# Altium PCB Repro_Amp_V87_Stage_v0.01.PcbDoc
Units mil, origin at the board's own origin, x right, y up, seen from the top; angles counter-clockwise.
Board outline 9000 x 4200 mil, 2 copper layers (Top Layer, Bottom Layer); 69 components, 43 nets, 167 pads, 0 vias.
Unrouted connection lines stored in the file: 1.
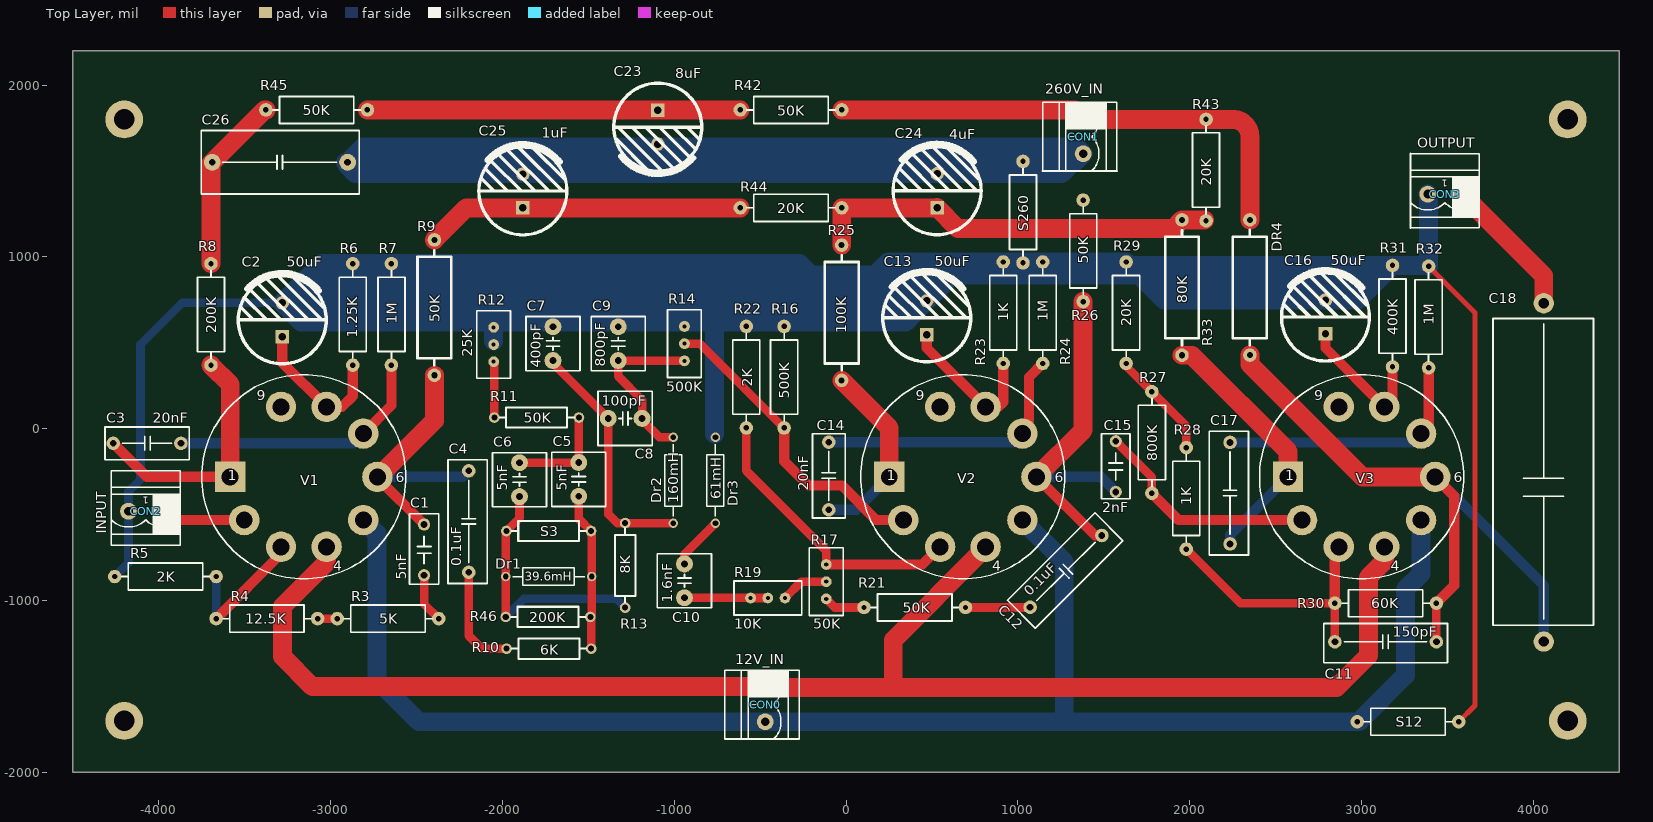
[diagram p0: Top Layer view]
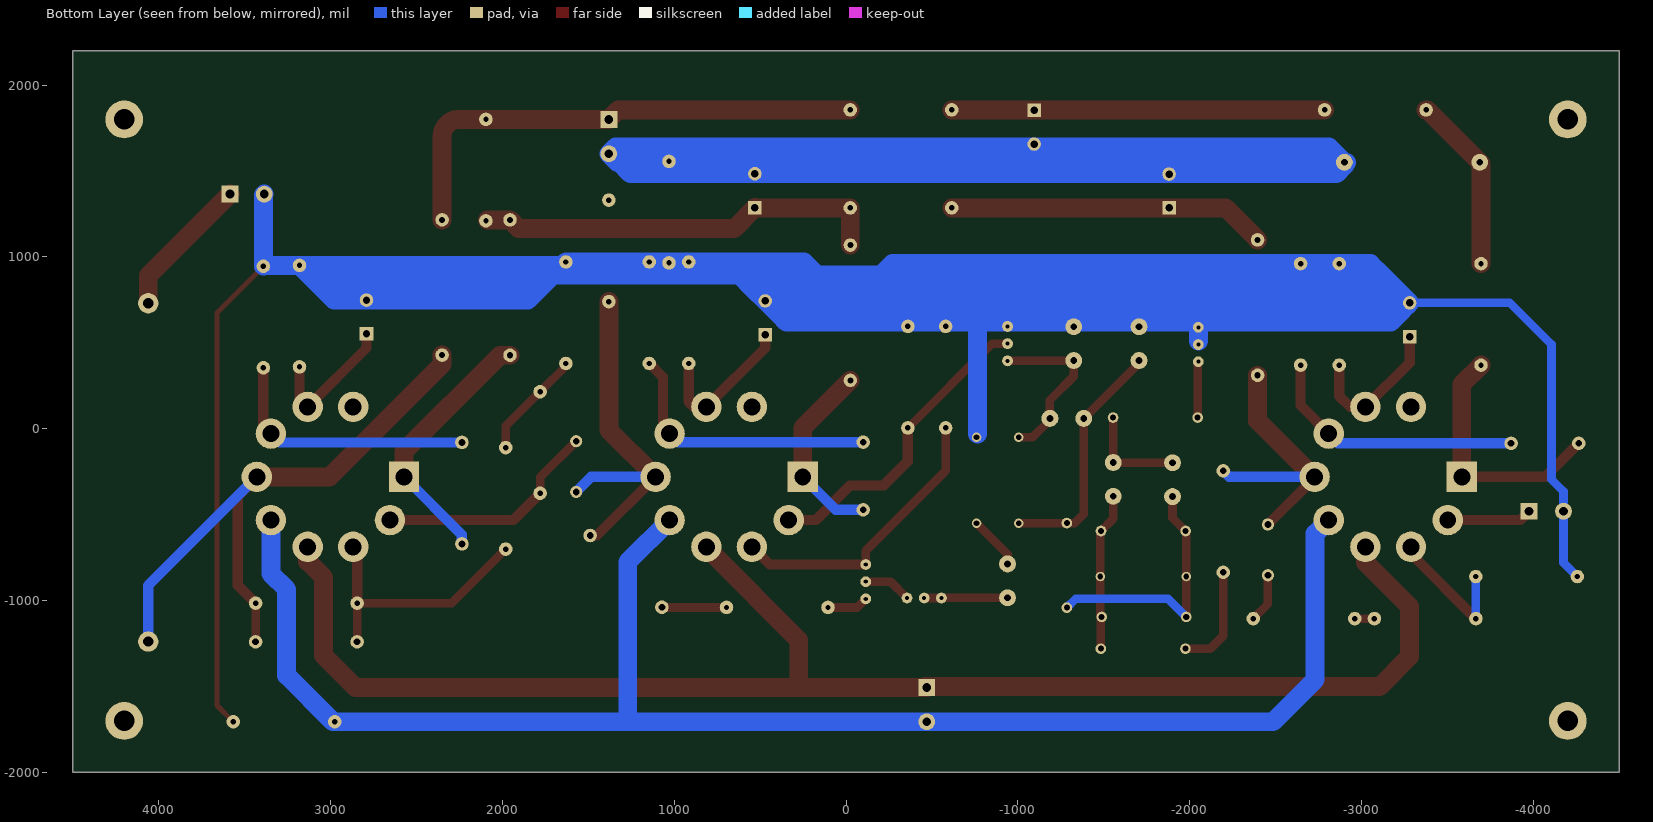
[diagram p1: Bottom Layer view, seen from below]
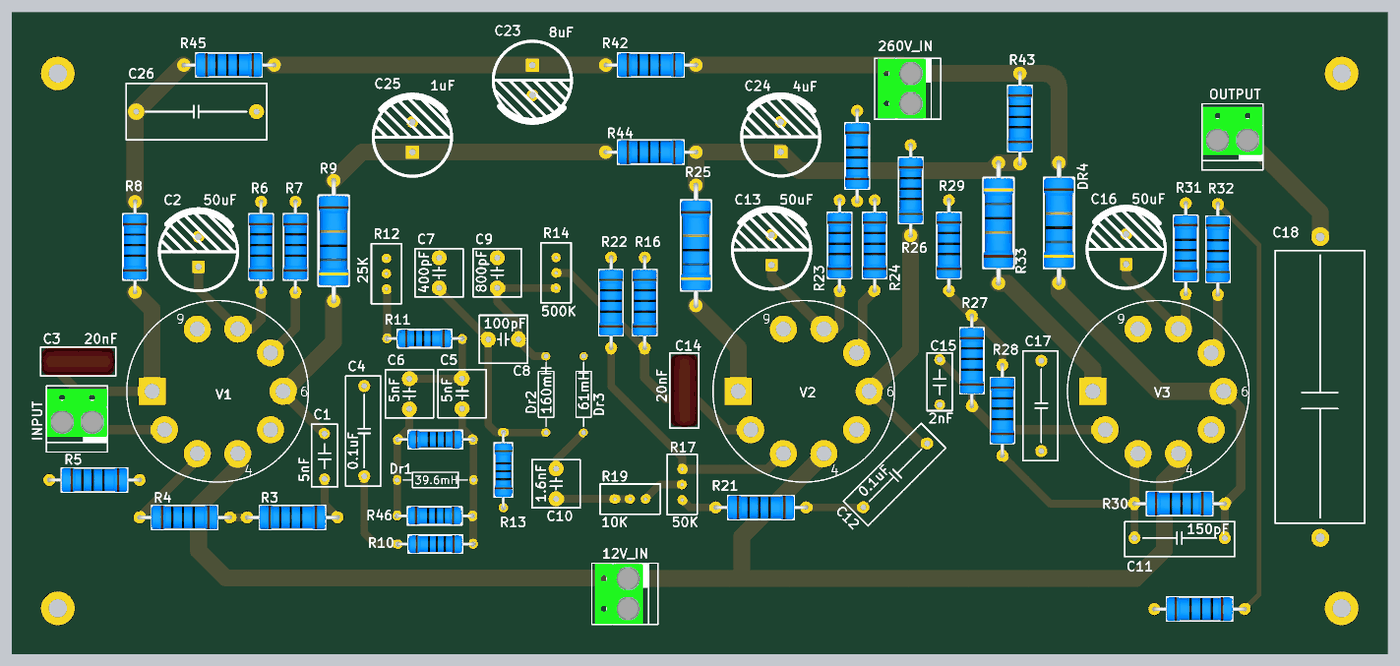
[diagram p2: 3D render of the assembled board from above, using the file's embedded part models]

## Layer stack, top to bottom
Top Solder: solder mask 0.4, Solder Resist, Dk 3.5
Top Layer: signal copper 1.4
Dielectric 1: dielectric 12.6, FR-4, Dk 4.8
Bottom Layer: signal copper 1.4
Bottom Solder: solder mask 0.4, Solder Resist, Dk 3.5

## Board outline
-4500,-2000 -4500,2200 4500,2200 4500,-2000

## Design rules (kind name [scope] priority, off if disabled: settings)
Clearance [All] p1: gap=10 ignorepadtopadclearanceinfootprint=FALSE except(0: Arc-Hole Track-Hole SMDPad-Hole THPad-Hole Via-Hole Fill-Hole Poly-Hole Region-Hole Text-Hole)
PolygonConnect [All] p1: connectstyle=Relief reliefconductorwidth=10 reliefentries=4 polygonreliefangle="90 Angle" airgapwidth=10
RoomDefinition ReproAmp_V87_Stage_v0.01 [InComponentClass('ReproAmp_V87_Stage_v0.01')] p1: confinementstyle=ConfineIn formatcopy=TRUE lockcomponents=FALSE outline 6895,-3646.3 29995,-3646.3 29995,-1436.3 6895,-1436.3
RoutingVias [All] p1: holewidth=28 width=50 viastyle="Through Hole" minholewidth=28 minwidth=50 maxholewidth=28 maxwidth=50
SolderMaskExpansion [All] p1: expansion=4
Width [All] p1: maxlimit=120 minlimit=10 preferedwidth=110
30 further rules are at their usual default settings.

## Components (designator, comment, footprint, x,y, rotation, side; value= is the part's Value field where it differs from the comment)
C1 "5nF" "CY 7.5*10*4" -2455,-705 r90 top
C2 "50uF" "CAP 5.0*12.5*20" -3280,633.43 r90 top
C3 "20nF" "CBB 10*12*8" -4066.85,-85 r180 top
C4 "0.1uF" "CBB 15*18*11" -2195,-540.28 r270 top
C5 "5nF" "CBB 7.2*7.2*13" -1555,-295 r270 top
C6 "5nF" "CBB 7.2*7.2*13" -1900,-296.57 r270 top
C7 "400pF" "CBB 7.2*7.2*13" -1705,495 r270 top
C8 "100pF" "CBB 7.2*7.2*13" -1285,60 r180 top
C9 "800pF" "CBB 7.2*7.2*13" -1325,495 r270 top
C10 "1.6nF" "CBB 7.2*7.2*13" -940,-885 r270 top
C11 "150pF" "CBB 15*18*11" 3140,-1240 r0 top
C12 "0.1uF" "CBB 15*18*11" 1280,-830 r225 top
C13 "50uF" "CAP 5.0*12.5*20" 470,645 r90 top
C14 "20nF" "CBB 10*12*8" -100,-275 r270 top
C15 "2nF" "CY 7.5*8*4" 1570,-220 r90 top
C16 "50uF" "CAP 5.0*12.5*20" 2790,650 r90 top
C17 "50nF" "CBB 15*18*11" 2235,-375 r270 top
C18 "8uF" "CBB 50*30*30" 4060,-1238.5 r90 top
C23 "8uF" "CAP 5.0*12.5*20" -1095,1755 r270 top
C24 "4uF" "CAP 5.0*12.5*20" 530,1385 r90 top
C25 "1uF" "CAP 5.0*12.5*20" -1880,1383.43 r90 top
C26 "4uF" "CBB 20*23*17" -3293.7,1550 r0 top
CON0 "12V_IN" HX5.08-2L -470,-1605 r270 top
CON1 "260V_IN" HX5.08-2L 1380,1700 r270 top
CON2 "INPUT" HX5.08-2L -4075,-480 r180 top
CON3 "OUTPUT" HX5.08-2L 3485,1365 r180 top
Dr1 "39.6mH" AXIAL-0.5 -1730,-860 r180 top
Dr2 "160mH" AXIAL-0.5 -1005,-300 r90 top value=10mH
Dr3 "61mH" AXIAL-0.5 -760,-300 r270 top value=10mH
DR4 "R-CRR" "RS 2W" 2350,822 r90 top
R3 "5K" "RS 1W" -2665,-1105 r0 top
R4 "12.5K" "RS 1W" -3370,-1105 r0 top
R5 "2K" "RS 1W" -3960,-860 r0 top
R6 "1.25K" "RS 1W" -2870,665.28 r270 top
R7 "1M" "RS 1W" -2645,665.28 r270 top
R8 "200K" "RS 1W" -3695,665 r270 top
R9 "50K" "RS 2W" -2395,705 r90 top
R10 "6K" "RS 1/2W" -1728.94,-1280 r180 top
R11 "50K" "RS 1/2W" -1800,65 r0 top
R12 "25K" "RS 1/2W-VR" -2050,490 r90 top
R13 "8K" "RS 1/2W" -1285,-795 r90 top
R14 "500K" "RS 1/2W-VR" -940,495 r90 top
R16 "500K" "RS 1W" -360,300 r270 top
R17 "50K" "RS 1/2W-VR" -115,-890 r90 top
R19 "10K" "RS 1/2W-VR" -455,-985 r180 top
R21 "50K" "RS 1W" 400,-1040 r0 top
R22 "2K" "RS 1W" -580,300 r270 top
R23 "1K" "RS 1W" 915,675 r270 top
R24 "1M" "RS 1W" 1145,675 r270 top
R25 "100K" "RS 2W" -25,675 r90 top
R26 "50K" "RS 1W" 1380,1035 r270 top
R27 "800K" "RS 1W" 1780,-80 r270 top
R28 "1K" "RS 1W" 1980,-405 r270 top
R29 "20K" "RS 1W" 1630,675 r270 top
R30 "60K" "RS 1W" 3140,-1015 r180 top
R31 "400K" "RS 1W" 3180,655 r90 top
R32 "1M" "RS 1W" 3390,650 r90 top
R33 "80K" "RS 2W" 1955,821.3 r270 top
R42 "50K" "RS 1W" -320,1855 r0 top
R43 "20K" "RS 1W" 2095,1505 r270 top
R44 "20K" "RS 1W" -320,1285 r0 top
R45 "50K" "RS 1W" -3080,1855 r0 top
R46 "200K" "RS 1/2W" -1733.94,-1095 r180 top
S3 "0" "RS 1/2W" -1730,-595 r180 top
S12 "10R" "RS 1W" 3270,-1705 r180 top
S260 "10R" "RS 1W" 1030,1260 r90 top
V1 "Tube E80CC" VTUBE-9-W -3155,-280 r0 top
V2 "Tube E80CC" VTUBE-9-W 680,-280 r0 top
V3 "Tube E80CC" VTUBE-9-W 3000,-280 r0 top

## Footprints (in the part's own frame and the unit in brackets; to place one, negate y for a bottom-side part, rotate by r counter-clockwise, add the part's x,y. Pads: shape width x height; smd on the part's side, far side on the other; paste and mask are expansions set on the pad)
AXIAL-0.5 [mm] "Axial Device, Thru-Hole; 2 Leads; 0.5 in Pin Spacing"
  round 1.4 hole 0.85: 1(-6.35,0) 2(6.35,0)
  silkscreen extent -5.33,-1.27 5.33,1.27
"CAP 5.0*12.5*20" [mm] "脚距5mm直径12.5mm高度20mm"
  rect 2x2 hole 1.1: 1(-2.5,0)
  round 2 hole 1.1: 2(2.5,0)
  silkscreen extent -6.5,-6.5 6.99,6.5, body extent -6.25,-6.25 6.26,6.25, height 20.03
"CBB 7.2*7.2*13" [mm] "脚距5mm高13mm厚7.2mm"
  round 2.5 hole 1: 1(-2.5,0) 2(2.5,0)
  silkscreen extent -4,-4 4,4, body extent -4,-4 4,4, height 17.53
"CBB 10*12*8" [mm] "脚距10mm高12mm厚8mm"
  round 2 hole 1: 1(-5,0) 2(5,0)
  silkscreen extent -6.22,-2.41 6.22,2.41, body extent -6,-2.25 6,2.25, height 8.53
"CBB 15*18*11" [mm] "脚距15mm高18mm厚11mm"
  round 2 hole 1: 1(-7.5,0) 2(7.5,0)
  silkscreen extent -9.15,-3.07 9.14,2.72, body extent -9.01,-2.92 8.99,2.58, height 11.53
"CBB 20*23*17" [mm] "脚距20mm高23mm厚17mm"
  round 2.5 hole 1: 1(-10,0) 2(10,0)
  silkscreen extent -11.65,-4.67 11.72,4.7, body extent -11.5,-4.5 11.5,4.5, height 17.53
"CBB 50*30*30" [mm] "大型耦合电容 脚距50mm 宽30mm"
  round 3 hole 1.5: 1(0,0) 2(50,0)
  silkscreen extent 2.41,-7.37 47.75,7.49, body extent 2.41,-7.49 47.75,7.62, height 30.3
"CY 7.5*8*4" [mm] "脚距7.5mm，直径8mm，厚4mm"
  round 1.8 hole 1: 1(-3.75,0) 2(3.75,0)
  silkscreen extent -4.75,-2.1 4.85,2.1, body extent -4.04,-2 4.04,2, height 8.2
"CY 7.5*10*4" [mm] "脚距7.5mm，直径10mm，厚4mm"
  round 1.8 hole 1: 1(-3.75,0) 2(3.75,0)
  silkscreen extent -5.08,-2.16 5.33,2.16, body extent -4.88,-2 5.12,2, height 10.2
HX5.08-2L [mm]
  rect 2.5x2.5 hole 1.3: 1(-2.54,0)
  round 2.5 hole 1.3: 2(2.54,0)
  silkscreen extent -5.08,-6 5.08,5, body extent -5.04,-5.5 4.96,2.5, height 11
"RS 1/2W" [mil] "直插色环电阻，脚距12.5mm，直径3mm"
  round 62 hole 35.43: 1(-246.06,0) 2(246.06,0)
  silkscreen extent -217,-59 217,59, body extent -256,-59 256,59, height 122
"RS 1/2W-VR" [mm] "直插3脚顶调可调电阻，脚距2.54mm，长10mm*宽5mm*高10mm"
  round 1.6 hole 0.6: 1(-2.54,0) 2(2.54,0) 3(0,0)
  silkscreen extent -5,-2.5 5,2.5
"RS 1W" [mm] "直插色环电阻，脚距15mm，直径4mm"
  round 2 hole 0.8: 1(-7.5,0) 2(7.5,0)
  silkscreen extent -6.5,-2 6.5,2, body extent -7.8,-2.01 7.8,2.01, height 4.11
"RS 2W" [mm] "直插色环电阻，脚距20mm，直径5mm"
  round 2 hole 0.9: 1(10,0) 2(-10,0)
  silkscreen extent -8.5,-2.5 8.5,2.5, body extent -10.4,-2.51 10.4,2.51, height 5.11
VTUBE-9-W [mm] "Vacuum Tube; 9 Leads"
  rect 4.5x4.5 hole 2.5: 1(-10.875,0)
  round 4.5 hole 2.5: 2(-8.8,-6.39) 3(-3.365,-10.345) 4(3.365,-10.345) 5(8.8,-6.39) 6(10.875,0) 7(8.8,6.39) 8(3.365,10.345) 9(-3.365,10.345)
  silkscreen extent -15.08,-15.08 15.08,15.08

## Part data
C1 C3 C4 C5 C6 C7 C8 C9 C10 C11 C12 C14 C15 C17 C18 C26: library part C-CBB, "CBB电容", BOM名称=CBB电容, 学习资源=www.ooocke.com, 版权归属=源创客
C2 C13 C16 C23 C24 C25: library part C-CAP, "直插电解电容", BOM名称=直插电解电容, 学习资源=www.ooocke.com, 版权归属=源创客
CON0 CON1 CON2 CON3: library part EDG5.08-2P
Dr1 Dr2 Dr3: library part "Inductor Iron", "Magnetic-Core Inductor", LatestRevisionDate=17-Jul-2002, LatestRevisionNote="Re-released for DXP Platform.", PackageDescription="Axial Device, Thru-Hole; 2 Leads; 0.9 in Pin Spacing", PackageReference=AXIAL-0.9, Published=24-Mar-1999, Publisher="Altium Limited"
DR4: "直插色环电阻", BOM名称=色环电阻, 学习资源=www.ooocke.com, 版权归属=源创客
R3 R4 R5 R6 R7 R8 R9 R10 R11 R13 R16 R21 R22 R23 R24 R25 R26 R27 R28 R29 R30 R31 R32 R33 R42 R43 R44 R45 R46 S3 S12 S260: library part R-CRR, "直插色环电阻", BOM名称=色环电阻, 学习资源=www.ooocke.com, 版权归属=源创客
R12 R14 R17 R19: library part VR-W, "直插可调电阻-顶调"
V1 V2 V3: library part "Tube 12AX7", "High Mu Dual Triode", LatestRevisionDate=17-Jul-2002, LatestRevisionNote="Re-released for DXP Platform.", PackageDescription="Vacuum Tube; 9 Leads", PackageReference=VTUBE-9, Published=8-Jun-2000, Publisher="Altium Limited"

## Free pads (board coordinates)
  round 220 hole 120: 2(-4200,-1700) 2(-4200,1800) 2(4200,-1700) 2(4200,1800)

## Nets (pads, with @x,y where several pads share a name; then routed paths per layer and width w, separated by ;. In a path a pad name is that pad's centre, name@x,y a point inside that pad or via, vN(x,y) a via of type N, cw(c..) or ccw(c..) an arc to the next point about the centre after c; other vN are vias at no path point)
G12: CON0.2 S12.2 V1.5 V2.5 V3.5 | length 9374.9
  Bottom Layer w110: V1.5 -2730,-610.12 -2730,-1460 -2485,-1705 CON0.2 1270,-1705 ; V2.5 1270,-775.12 1270,-1705 ; V3.5 3346.46,-843.54 3255,-935 3255,-1435 2985,-1705 S12.2 1270,-1705
GND: C2.2 C7.1 C9.1 C13.2 C16.2 CON2.2 CON3.2 Dr3.1 R5.1 R6.1 R7.1 R12.2 R12.3 R14.2 R16.1 R22.1 R23.1 R24.1 R29.1 R31.2 R32.2 S12.1 S260.1 | length 36095.8
  Top Layer w30: R32.2 3660,675.28 3660,-1610.28 S12.1
  Bottom Layer w50: R5.1 -4175,-779.72 CON2.2 -4175,-365 -4105,-295 -4105,490 -3863.15,731.85 C2.2 ; -765,620 -760,615
  Bottom Layer w110: C2.2@-3270,720 -3215,665 ; R6.1@-2860,950 -2918.15,891.85 ; R12.3@-2050,510 R12.2 R12.2@-2050,620 ; Dr3.1@-765,-30 -765,620 ; -288.15,891.85 -2645,891.85 -2918.15,891.85 ; CON3.2 3390,1360 R32.2 3385,950.28 R31.2 ; -3215,665 -3170,620 R12.2@-2050,620 ; -3215,665 -1325,665 391.58,665 ; -3186.85,825 -3120,891.85 ; -3186.85,825 C2.2 -3078.15,731.85 ; -3186.85,825 -2985,825 ; -3120,891.85 -3051.3,960.55 R6.1 R7.1 -270.55,960.55 -205,895 170,895 ; -3120,891.85 -2918.15,891.85 ; -3078.15,731.85 -223.43,731.85 -211.85,743.42 C13.2 ; -3078.15,731.85 -2985,825 ; -2985,825 -2918.15,891.85 ; -2985,825 525,825 538.29,811.71 ; R12.2@-2050,620 -765,620 ; -765,620 346.58,620 391.58,665 ; 170,895 621.58,895 ; 170,895 245.28,970.28 696.85,970.28 ; 391.58,665 C13.2 ; C13.2 538.29,811.71 ; 538.29,811.71 621.58,895 ; 621.58,895 696.85,970.28 ; 621.58,895 1695.28,895 1700.28,900 ; 696.85,970.28 R23.1 R24.1 R29.1 R29.1@1650,950.28 ; R29.1@1650,950.28 1700.28,900 ; R29.1@1650,950.28 R31.2 ; 1700.28,900 1755.28,845 ; 1755.28,845 1851.85,748.42 C16.2 2978.15,748.42 3074.72,845 ; 1755.28,845 3074.72,845 ; 3074.72,845 R31.2
NetC1_1: C1.1 R3.2 | length 287.7
  Top Layer w50: C1.1 -2455,-1019.72 R3.2
NetC1_2: C1.2 C4.1 R9.2 V1.6 | length 1670.6
  Top Layer w60: V1.6 -2726.85,-285.51 C1.2
  Top Layer w110: V1.6@-2726.85,-285.51 -2395,46.34 R9.2
  Bottom Layer w60: V1.6 -2230,-280 C4.1
NetC2_1: C2.1 R6.2 V1.8 | length 872.9
  Top Layer w60: C2.1 -3280,384.76 V1.8 -2932.72,127.28 -2870,190 R6.2
NetC3_1: C3.1 R7.2 V1.7 | length 1551.1
  Top Layer w60: V1.7 -2645,135.12 R7.2
  Bottom Layer w60: C3.1 -2865.12,-85 V1.7
NetC3_2: C3.2 R8.2 V1.1 | length 1457.4
  Top Layer w60: C3.2 -4068.7,-280 V1.1
  Top Layer w110: R8.2 -3583.15,257.87 V1.1
NetC4_2: C4.2 R10.2 | length 620.5
  Top Layer w50: C4.2 -2195,-1205 -2120,-1280 R10.2
NetC5_1: C5.1 C6.1 R11.2 | length 607.7
  Top Layer w50: C6.1 -1556.57,-198.15 C5.1 -1553.94,-195.51 R11.2
NetC5_2: C5.2 Dr1.1 R10.1 R46.1 S3.1 | length 923
  Top Layer w50: C5.2 -1555,-523.94 S3.1 -1480,-598.94 Dr1.1 -1480,-1087.13 R46.1 -1482.87,-1100 R10.1
NetC6_2: C6.2 Dr1.2 R13.1 R46.2 S3.2 | length 1492.8
  Top Layer w50: R46.2 Dr1.2 -1980,-598.94 S3.2 -1900,-518.94 C6.2
  Bottom Layer w50: R46.2 -1875,-990 -1336.06,-990 R13.1
NetC7_2: C7.2 C8.2 Dr2.1 R13.2 | length 1426.9
  Top Layer w50: C7.2 -1705,381.57 C8.2 -1383.43,-496.57 -1331.06,-548.94 R13.2 -1283.94,-550 Dr2.1
NetC8_1: C8.1 C9.2 Dr2.2 R14.1 | length 1011.6
  Top Layer w50: Dr2.2 -1085,-50 -1186.57,51.57 C8.1 -1186.57,166.57 -1325,305 C9.2 -941.57,396.57 R14.1
NetC10_1: C10.1 Dr3.2 | length 311.1
  Top Layer w50: C10.1 -940,-730 Dr3.2
NetC10_2: C10.2 R19.2 R19.3 | length 485.7
  Top Layer w50: C10.2 -556.57,-983.43 R19.2 R19.3
NetC11_1: C11.1 R28.2 R30.2 V3.3 | length 1557.2
  Top Layer w50: R28.2 2294.72,-1015 R30.2 C11.1
  Top Layer w60: R30.2 2844.72,-710.08 V3.3
NetC11_2: C11.2 C18.1 DR4.2 R30.1 V3.6 | length 3672.7
  Top Layer w50: C11.2 R30.1
  Top Layer w60: V3.6 3540,-391.85 3540,-910.28 R30.1
  Top Layer w110: DR4.2 2350,375 3005,-280 V3.6
  Bottom Layer w60: V3.6 4060,-911.85 C18.1
NetC12_1: C12.1 C15.1 R26.2 V2.6 | length 2152.5
  Top Layer w60: V2.6 1449.36,-621.21 C12.1
  Top Layer w110: V2.6 1380,-8.15 R26.2
  Bottom Layer w60: V2.6 1482.36,-280 C15.1
NetC12_2: C12.2 R21.2 | length 376.4
  Top Layer w50: R21.2 1070,-1040 C12.2
NetC13_1: C13.1 R23.2 V2.8 | length 899.9
  Top Layer w60: C13.1 470,469.76 V2.8 887.28,127.28 915,155 R23.2
NetC14_1: C14.1 R24.2 V2.7 | length 1604.4
  Top Layer w60: V2.7 1065,10.12 1065,299.72 R24.2
  Bottom Layer w50: C14.1 C14.1@-99.94,-78.09
  Bottom Layer w60: C14.1 976.73,-78.15 V2.7
NetC14_2: C14.2 R25.2 V2.1 | length 1107.3
  Top Layer w110: R25.2 251.85,4.45 V2.1
  Bottom Layer w60: C14.2 60,-471.85 V2.1
NetC15_2: C15.2 R27.2 V3.2 | length 1328.2
  Top Layer w50: C15.2 1780,-282.36 R27.2
  Top Layer w60: R27.2 1936.3,-531.57 V3.2
NetC16_1: C16.1 R31.1 V3.8 | length 818.3
  Top Layer w60: C16.1 2790,469.76 V3.8 3180,174.8 R31.1
NetC17_1: C17.1 R32.1 V3.7 | length 1533.9
  Top Layer w60: V3.7 3390,15.12 R32.1
  Bottom Layer w60: C17.1 3295.16,-79.72 V3.7
NetC17_2: C17.2 R33.1 V3.1 | length 1526.5
  Top Layer w110: R33.1 2012.4,427.6 2571.85,-131.85 V3.1
  Bottom Layer w60: C17.2 2235,-616.85 V3.1
NetC18_2: C18.2 CON3.1 | length 831.8
  Top Layer w110: CON3.1 4060,890 C18.2
NetC23_1: C23.1 R42.1 R45.2 | length 2169.4
  Top Layer w110: R45.2 R42.1
NetC23_2: C23.2 C24.2 C25.2 C26.2 CON1.2 S260.2 | length 17232.1
  Bottom Layer w110: C26.2@-2911.3,1550 C26.2 ; C26.2 1320,1550 ; C26.2 -2850,1600 ; C26.2 -2900,1530 -2855,1485 1255,1485 1320,1550 ; -2850,1600 CON1.2@1370,1600 ; -2850,1600 -2810,1640 1340,1640 CON1.2 ; 1320,1550 CON1.2@1370,1600 ; 1320,1550 1330,1550 CON1.2 ; CON1.2@1370,1600 CON1.2
NetC24_1: C24.1 R25.1 R33.2 R43.2 R44.2 | length 2394.8
  Top Layer w110: R25.1 -25,1275 R44.2@-20,1280 ; R44.2 528.43,1285 C24.1 651.57,1165 1905,1165 R33.2 R43.2@2085,1215
NetC25_1: C25.1 R9.1 R44.1 | length 1856.9
  Top Layer w110: R9.1 -2208.7,1285 C25.1 R44.1
NetC26_1: C26.1 R8.1 R45.1 | length 1031.3
  Top Layer w110: R8.1 -3695,1542.4 C26.1 -3382.4,1855 R45.1
NetCON1_1: CON1.1 DR4.1 R26.1 R42.2 R43.1 | length 2939.3
  Top Layer w110: R42.2 1325,1855 CON1.1 1380.28,1800.28 R43.1 2250,1800.28 cw(c2250,1700.28) 2350,1700.28 DR4.1
NetCON2_1: CON2.1 V1.2 | length 494.9
  Top Layer w60: CON2.1 -3923.43,-531.57 V1.2
NetR3_1: R3.1 R4.2 | length 114.4
  Top Layer w50: R4.2 R3.1
NetR4_1: R4.1 R5.2 V1.3 | length 819.4
  Top Layer w60: R4.1 -3287.48,-727.2 V1.3
  Bottom Layer w50: R4.1 -3664.72,-1104.45 R5.2
NetR11_1: R11.1 R12.1 | length 326.6
  Top Layer w50: R12.1 -2046.06,386.06 R11.1
NetR14_3: R14.3 R16.2 V2.2 | length 1812.8
  Top Layer w50: R14.3 -850.28,495 R16.2
  Top Layer w60: R16.2 -360,-190 -220,-330 -25,-330 176.57,-531.57 V2.2
NetR17_1: R17.1 R21.1 | length 240.4
  Top Layer w50: R17.1 -65,-1040 R21.1
NetR17_2: R17.2 R22.2 V2.3 | length 1692.4
  Top Layer w50: R22.2 -580,-245 -115,-710 R17.2
  Top Layer w60: R17.2 444.8,-790 V2.3
NetR17_3: R17.3 R19.1 | length 279.4
  Top Layer w50: R19.1 -260,-890 R17.3
NetR27_1: R27.1 R28.1 R29.2 | length 634.4
  Top Layer w50: R29.2 1630,365.28 R27.1 1980,15.28 R28.1
V12: CON0.1 V1.4 V2.4 V3.4 | length 8915.8
  Top Layer w110: V1.4 -3022.52,-777.52 -3280,-1035 -3280,-1325 -3105,-1500 CON0.1@-460,-1500 ; CON0.1 275,-1505 ; V2.4@785,-695 785,-720 275,-1230 275,-1505 ; V3.4 3132.48,-772.52 3040,-865 3040,-1320 2855,-1505 275,-1505
pads on no net: V1.9 V2.9 V3.9

## Silkscreen, mask and mechanical layers (free items; w line width, h text height)
Mechanical 1:
  the board outline again, w10

## Text inside footprints (layer, text, board x,y; h text height)
CON0: Top Overlay "1" at -553,-1588 h40 r270
CON1: Top Overlay "1" at 1297,1717 h40 r270
CON2: Top Overlay "1" at -4058,-397 h40 r180
CON3: Top Overlay "1" at 3502,1448 h40 r180
V1: Top Overlay "4" at -2985,-825 h59.06; Top Overlay "6" at -2620,-310 h59.06; Top Overlay "9" at -3430,165 h59.06; Top Overlay "1" at -3598.5,-300 h59.06
V2: Top Overlay "4" at 850,-825 h59.06; Top Overlay "6" at 1215,-310 h59.06; Top Overlay "9" at 405,165 h59.06; Top Overlay "1" at 236.5,-300 h59.06
V3: Top Overlay "4" at 3170,-825 h59.06; Top Overlay "6" at 3535,-310 h59.06; Top Overlay "9" at 2725,165 h59.06; Top Overlay "1" at 2556.5,-300 h59.06